# EAGLE board CT_schematic (EAGLE 7.6.0)

Size 100 x 80 mm. Coordinates in mm from the lower left corner, seen from the top.
Outline: 0,0 100,0 100,80 0,80 0,0
Copper layers (1*16): Top 0.035mm / dielectric 1.5mm / Bottom 0.035mm
Design rules "default": minimum track width 10mil, minimum drill 24mil, track to track 8mil, track to pad 8mil, pad to pad 8mil, via to via 8mil, smd to smd 8mil, copper to edge 40mil, drill to drill 8mil, minimum pad ring 10mil, minimum via ring 8mil, stop-mask expansion 4mil, vias tented up to drill 0mil, thermal gap 10mil

## Footprints (pad centres in the part's own frame; a part is rotated, then mirrored left to right if it is on the bottom)
C0603 = smd 0.8 x 0.8: 1 -0.762,0; 2 0.762,0
C0402 = smd 0.5 x 0.5: 1 -0.508,0; 2 0.508,0
C0805 = smd 1.2 x 1.3: 1 -1.016,0; 2 1.016,0
C1210 = smd 1.2 x 2.5: 1 -1.524,0; 2 1.524,0
EXV-9H = smd 3.505 x 1.676: 1 -2.857,0; 2 2.857,0
L1210 = smd 1.2 x 2.5: 1 -1.524,0; 2 1.524,0
PJ-037B_PACKAGE = drill 3.7 square: 1 12,0 | drill 3.2 square: 2 6,0
R0603 = smd 0.8 x 0.8: 1 -0.762,0; 2 0.762,0
WLCSP104 = smd 0.229 x 0.229: A1 -1.6,2.2; A2 -1.2,2.2; A3 -0.8,2.2; A4 -0.4,2.2; A5 0,2.2; A6 0.4,2.2; A7 0.8,2.2; A8 1.2,2.2; A9 1.6,2.2; B1 -1.6,1.8; B2 -1.2,1.8; B3 -0.8,1.8; B4 -0.4,1.8; B5 0,1.8; B6 0.4,1.8; B7 0.8,1.8; B8 1.2,1.8; B9 1.6,1.8; C1 -1.6,1.4; C2 -1.2,1.4; C3 -0.8,1.4; C4 -0.4,1.4; C5 0,1.4; C6 0.4,1.4; C7 0.8,1.4; C8 1.2,1.4; C9 1.6,1.4; D1 -1.6,1; D2 -1.2,1; D3 -0.8,1; D4 -0.4,1; D5 0,1; D6 0.4,1; D7 0.8,1; D8 1.2,1; D9 1.6,1; E1 -1.6,0.6; E2 -1.2,0.6; E3 -0.8,0.6; E4 -0.4,0.6; E6 0.4,0.6; E7 0.8,0.6; E8 1.2,0.6; E9 1.6,0.6; F1 -1.6,0.2; F2 -1.2,0.2; F3 -0.8,0.2; F4 -0.4,0.2; F6 0.4,0.2; F7 0.8,0.2; F8 1.2,0.2; F9 1.6,0.2; G1 -1.6,-0.2; G2 -1.2,-0.2; G3 -0.8,-0.2; G4 -0.4,-0.2; G6 0.4,-0.2; G7 0.8,-0.2; G8 1.2,-0.2; G9 1.6,-0.2; H1 -1.6,-0.6; H2 -1.2,-0.6; H3 -0.8,-0.6; H4 -0.4,-0.6; H6 0.4,-0.6; H7 0.8,-0.6; H8 1.2,-0.6; H9 1.6,-0.6; J1 -1.6,-1; J2 -1.2,-1; J3 -0.8,-1; J4 -0.4,-1; J5 0,-1; J6 0.4,-1; J7 0.8,-1; J8 1.2,-1; J9 1.6,-1; K1 -1.6,-1.4; K2 -1.2,-1.4; K3 -0.8,-1.4; K4 -0.4,-1.4; K5 0,-1.4; K6 0.4,-1.4; K7 0.8,-1.4; K8 1.2,-1.4; K9 1.6,-1.4; L1 -1.6,-1.8; L2 -1.2,-1.8; L3 -0.8,-1.8; L4 -0.4,-1.8; L5 0,-1.8; L6 0.4,-1.8; L7 0.8,-1.8; L8 1.2,-1.8; L9 1.6,-1.8; M1 -1.6,-2.2; M2 -1.2,-2.2; M3 -0.8,-2.2; M4 -0.4,-2.2; M5 0,-2.2; M6 0.4,-2.2; M7 0.8,-2.2; M8 1.2,-2.2; M9 1.6,-2.2
SSOP-16 = smd 1.981 x 0.356: 1 -2.464,2.223; 2 -2.464,1.587; 3 -2.464,0.953; 4 -2.464,0.318; 5 -2.464,-0.318; 6 -2.464,-0.953; 7 -2.464,-1.587; 8 -2.464,-2.223; 9 2.464,-2.223; 10 2.464,-1.587; 11 2.464,-0.953; 12 2.464,-0.318; 13 2.464,0.318; 14 2.464,0.953; 15 2.464,1.587; 16 2.464,2.223
HTSS-105-01-G-D = drill 1 pad 1.8 square: 1 0,0 | drill 1 pad 1.8: 2 0,2.54; 3 2.54,0; 4 2.54,2.54; 5 5.08,0; 6 5.08,2.54; 7 7.62,0; 8 7.62,2.54; 9 10.16,0; 10 10.16,2.54
M41T65_QFN-16 = smd 0.775 x 0.305: 1 -1.387,0.75; 2 -1.387,0.25; 3 -1.387,-0.25; 4 -1.387,-0.75; 9 1.387,-0.75; 10 1.387,-0.25; 11 1.387,0.25; 12 1.387,0.75 | smd 0.305 x 0.775: 5 -0.75,-1.387; 6 -0.25,-1.387; 7 0.25,-1.387; 8 0.75,-1.387; 13 0.75,1.387; 14 0.25,1.387; 15 -0.25,1.387; 16 -0.75,1.387 | smd 1.6 x 1.6: 17 0,0
QFN-32 = smd 0.6 x 0.3: 1 -2.3,1.75; 2 -2.3,1.25; 3 -2.3,0.75; 4 -2.3,0.25; 5 -2.3,-0.25; 6 -2.3,-0.75; 7 -2.3,-1.25; 8 -2.3,-1.75; 17 2.3,-1.75; 18 2.3,-1.25; 19 2.3,-0.75; 20 2.3,-0.25; 21 2.3,0.25; 22 2.3,0.75; 23 2.3,1.25; 24 2.3,1.75 | smd 0.3 x 0.6: 9 -1.75,-2.3; 10 -1.25,-2.3; 11 -0.75,-2.3; 12 -0.25,-2.3; 13 0.25,-2.3; 14 0.75,-2.3; 15 1.25,-2.3; 16 1.75,-2.3; 25 1.75,2.3; 26 1.25,2.3; 27 0.75,2.3; 28 0.25,2.3; 29 -0.25,2.3; 30 -0.75,2.3; 31 -1.25,2.3; 32 -1.75,2.3 | smd 3.2 x 3.2: EXP 0,0
SJ-43515TS-SMT-TR = smd 2.2 x 3: 1 0.6,-7.4; 4 3.4,-7.4 | smd 3 x 3: 2 12.8,-7.4; 5 17,-3 | smd 2 x 3: 3 5.3,0; 6 2.5,0 | drill 1.8: P$7 4.5,-3.69; P$8 11.54,-3.69
WM-64PC = drill 0.6 pad 1: 1 -1,0.95; 2 -1,-0.95
ABS07-32.768KHZ-7-T = smd 1.1 x 2.4: 1 -2.5,0; 2 0,0
ABLS-25.000MHZ-B2F-T = smd 5.6 x 2.8: 1 -3.81,0; 2 5.69,0
ASFL1 = smd 1.7 x 1.5: 1 -1.27,-1.1; 2 1.27,-1.1; 3 1.27,1.1; 4 -1.27,1.1
WSON-8 = smd 0.3 x 0.6: 1 -0.75,0; 2 0.05,0; 3 0.85,0; 4 1.65,0; 5 1.65,3.8; 6 0.85,3.8; 7 0.05,3.8; 8 -0.75,3.8 | smd 3 x 2.6: PAD 0.45,1.9
SON-6 = smd 0.55 x 0.3: 1 -0.355,0.5 | smd 0.52 x 0.3: 2 -0.37,0; 3 -0.37,-0.5; 4 0.37,-0.5; 5 0.37,0; 6 0.37,0.5
SW_4-1437565-2 = smd 1.4 x 2.1: 1 -2.23,4.55; 2 -2.23,-4.55; 3 2.23,4.55; 4 2.23,-4.55
LGM67K-G1J2-24-Z = smd 0.8 x 1.4: A -2,0; C 0,0
NC7SZ125M5X = smd 1.3 x 0.7: 1 -1.3,0.95; 2 -1.3,0; 3 -1.3,-0.95; 4 1.3,-0.95; 5 1.3,0.95

## Placement (x,y rotation side)
C1  1e-07  [C0603]  -77.47,67.31 0 top  (outside the outline)
C2  1e-07  [C0603]  -81.28,67.31 0 top  (outside the outline)
C3  1e-07  [C0603]  -15.24,72.39 0 top  (outside the outline)
C4  1e-07  [C0603]  -19.05,72.39 0 top  (outside the outline)
C5  1e-07  [C0603]  -22.86,72.39 0 top  (outside the outline)
C6  1e-07  [C0603]  -26.67,72.39 0 top  (outside the outline)
C7  1e-07  [C0603]  -30.48,72.39 0 top  (outside the outline)
C8  4.7e-06  [C0603]  -69.85,67.31 0 top  (outside the outline)
C9  1e-07  [C0603]  -34.29,72.39 0 top  (outside the outline)
C10  1e-08  [C0603]  -38.1,72.39 0 top  (outside the outline)
C11  1e-06  [C0603]  -41.91,72.39 0 top  (outside the outline)
C12  1e-11  [C0402]  -64.77,77.47 0 top  (outside the outline)
C13  1e-11  [C0402]  -68.58,77.47 0 top  (outside the outline)
C14  1e-11  [C0402]  -72.39,77.47 0 top  (outside the outline)
C15  1e-11  [C0402]  -76.2,77.47 0 top  (outside the outline)
C16  1e-06  [C0603]  -45.72,72.39 0 top  (outside the outline)
C17  1e-06  [C0603]  -49.53,72.39 0 top  (outside the outline)
C18  2.2e-07  [C0603]  -73.66,67.31 0 top  (outside the outline)
C19  1e-06  [C0603]  -53.34,72.39 0 top  (outside the outline)
C20  1e-06  [C0603]  -57.15,72.39 0 top  (outside the outline)
C21  4.7e-06  [C0805]  -78.74,59.69 0 top  (outside the outline)
C22  1e-06  [C0603]  -60.96,72.39 0 top  (outside the outline)
C23  1e-06  [C0603]  -64.77,72.39 0 top  (outside the outline)
C24  1e-06  [C0603]  -68.58,72.39 0 top  (outside the outline)
C25  1e-06  [C0603]  -72.39,72.39 0 top  (outside the outline)
C26  1e-06  [C0603]  -76.2,72.39 0 top  (outside the outline)
C27  1e-06  [C0603]  -80.01,72.39 0 top  (outside the outline)
C28  1e-06  [C0603]  -15.24,77.47 0 top  (outside the outline)
C29  1e-07  [C0402]  -80.01,77.47 0 top  (outside the outline)
C30  1e-07  [C0402]  -15.24,82.55 0 top  (outside the outline)
C31  1e-07  [C0402]  -19.05,82.55 0 top  (outside the outline)
C32  1e-07  [C0402]  -22.86,82.55 0 top  (outside the outline)
C33  1e-06  [C0603]  -19.05,77.47 0 top  (outside the outline)
C34  1e-08  [C0402]  -26.67,82.55 0 top  (outside the outline)
C35  1e-08  [C0402]  -30.48,82.55 0 top  (outside the outline)
C36  1e-05  [C1210]  -48.26,60.96 0 top  (outside the outline)
C37  1e-05  [C0805]  -15.24,67.31 0 top  (outside the outline)
C38  1e-08  [C0402]  -34.29,82.55 0 top  (outside the outline)
C39  1e-05  [C1210]  -54.61,60.96 0 top  (outside the outline)
C40  1e-05  [C1210]  -60.96,60.96 0 top  (outside the outline)
C41  1e-07  [C0402]  -38.1,82.55 0 top  (outside the outline)
C42  0.0001  [EXV-9H]  -17.78,53.34 0 top  (outside the outline)
C43  0.0001  [EXV-9H]  -29.21,53.34 0 top  (outside the outline)
C44  1e-08  [C0402]  -41.91,82.55 0 top  (outside the outline)
I1  1e-05  [L1210]  -67.31,60.96 0 top  (outside the outline)
J1  PJ-037B  [PJ-037B_PACKAGE]  -55.88,21.59 0 top  (outside the outline)
R2  1000.0  [R0603]  -22.86,77.47 0 top  (outside the outline)
R4  4700.0  [R0603]  -26.67,77.47 0 top  (outside the outline)
R5  2200.0  [R0603]  -30.48,77.47 0 top  (outside the outline)
R6  2200.0  [R0603]  -34.29,77.47 0 top  (outside the outline)
R7  10000.0  [R0603]  -45.72,67.31 0 top  (outside the outline)
R8  100000.0  [R0603]  -20.32,67.31 0 top  (outside the outline)
R9  10000.0  [R0603]  -50.8,67.31 0 top  (outside the outline)
R10  10000.0  [R0603]  -55.88,67.31 0 top  (outside the outline)
R11  1270.0  [R0603]  -38.1,77.47 0 top  (outside the outline)
R12  1270.0  [R0603]  -41.91,77.47 0 top  (outside the outline)
R13  100000.0  [R0603]  -25.4,67.31 0 top  (outside the outline)
R14  200.0  [R0603]  -45.72,77.47 0 top  (outside the outline)
R15  1000.0  [R0603]  -49.53,77.47 0 top  (outside the outline)
R16  100000.0  [R0603]  -30.48,67.31 0 top  (outside the outline)
R17  2231.0  [R0603]  -53.34,77.47 0 top  (outside the outline)
R18  1000.0  [R0603]  -57.15,77.47 0 top  (outside the outline)
R19  10000.0  [R0603]  -60.96,67.31 0 top  (outside the outline)
R20  10000.0  [R0603]  -66.04,67.31 0 top  (outside the outline)
R21  9100.0  [R0603]  -60.96,77.47 0 top  (outside the outline)
R22  680000.0  [R0603]  -35.56,67.31 0 top  (outside the outline)
R23  120000.0  [R0603]  -40.64,67.31 0 top  (outside the outline)
U1  STM32L162VEY6TR  [WLCSP104]  -74.93,43.18 0 top  (outside the outline)
U2  LTC2804CGN-1#PBF  [SSOP-16]  -29.21,34.29 0 top  (outside the outline)
U3  HTSS-105-01-G-D  [HTSS-105-01-G-D]  -74.93,33.02 0 top  (outside the outline)
U4  M41T65Q6F  [M41T65_QFN-16]  -46.99,82.55 0 top  (outside the outline)
U5  SGTL5000XNAA3  [QFN-32]  -54.61,34.29 0 top  (outside the outline)
U6  SJ-43515TS-SMT-TR  [SJ-43515TS-SMT-TR]  -39.37,10.16 0 top  (outside the outline)
U7  SJ-43515TS-SMT-TR  [SJ-43515TS-SMT-TR]  -67.31,10.16 0 top  (outside the outline)
U8  SJ-43515TS-SMT-TR  [SJ-43515TS-SMT-TR]  -39.37,24.13 0 top  (outside the outline)
U9  WM-64PCT  [WM-64PC]  -40.64,34.29 0 top  (outside the outline)
U10  ABS07-32.768KHZ-7-T  [ABS07-32.768KHZ-7-T]  -71.12,53.34 0 top  (outside the outline)
U11  ABS07-32.768KHZ-7-T  [ABS07-32.768KHZ-7-T]  -27.94,60.96 0 top  (outside the outline)
U12  ABLS-25.000MHZ-B2F-T  [ABLS-25.000MHZ-B2F-T]  -48.26,53.34 0 top  (outside the outline)
U13  ASFL-24.57MHZ-NCS  [ASFL1]  -68.58,44.45 0 top  (outside the outline)
U14  LP3878SDX-ADJ/NOPB  [WSON-8]  -30.48,43.18 0 top  (outside the outline)
U15  LP3878SDX-ADJ/NOPB  [WSON-8]  -50.8,43.18 0 top  (outside the outline)
U16  TPS3895ADRYR  [SON-6]  -52.07,81.28 0 top  (outside the outline)
U17  4-1437565-2  [SW_4-1437565-2]  -72.39,21.59 0 top  (outside the outline)
U18  Q65110A2395  [LGM67K-G1J2-24-Z]  -36.83,60.96 0 top  (outside the outline)
U19  nc7sz125m5x  [NC7SZ125M5X]  -72.39,59.69 0 top  (outside the outline)

## Library data of the parts
C1-C44 I1 J1 R2 R4-R23 U1-U19 = circuit_tree

## Nets
CLK_CRYSTAL_U1_D8: C12.1 U1.D8 U11.1
CLK_CRYSTAL_U1_D9: C13.1 U1.D9 U11.2
CLK_CRYSTAL_U1_F8: C14.1 U1.F8 U12.1
CLK_CRYSTAL_U1_F9: C15.1 U1.F9 U12.2
CLK_CRYSTAL_U4_1: U4.1 U10.1
CLK_CRYSTAL_U4_2: U4.2 U10.2
CLK_U5_21: U5.21 U13.3
GND: C1.2 C2.2 C3.2 C4.2 C5.2 C6.2 C7.2 C8.2 C9.2 C10.2 C11.2 C12.2 C13.2 C14.2 C15.2 C16.2 C17.2 C19.2 C20.2 C21.2 C29.2 C30.2 C31.2 C32.2 C33.2 C34.2 C35.2 C36.2 C37.2 C38.2 C39.2 C40.2 C41.2 C42.2 C43.2 C44.2 J1.2 R2.2 R7.2 R12.2 R15.2 R18.2 R21.2 R23.2 U1.A1 U1.C7 U1.D2 U1.E8 U1.H8 U1.J9 U1.K8 U1.L2 U1.M1 U2.8 U3.9 U4.3 U4.5 U4.17 U5.1 U5.3 U5.7 U5.EXP U7.1 U8.1 U9.2 U13.2 U14.3 U14.PAD U15.3 U15.PAD U16.2 U18.C U19.1 U19.3
NET_U1_A7: R7.1 U1.A7
NET_U1_B6: R6.1 U1.B6 U4.9
NET_U1_C5: R5.1 U1.C5 U4.10
NET_U1_E7: C9.1 U1.E7
NET_U1_F7: R4.1 U1.F7 U19.4
NET_U1_M7: U18.A
NET_U1_M8: U17.3 U17.4
NET_U2_6: C16.1 U2.6
NET_U2_7: C18.1 I1.2 U2.7
NET_U2_9: C17.1 U2.9
NET_U2_10: C18.2 U2.10
NET_U2_11: R8.1 U2.11
NET_U3_3: U2.1 U3.3
NET_U3_4: U2.2 U3.4
NET_U3_5: U2.3 U3.5
NET_U3_6: U2.4 U3.6
NET_U4_4: R9.1 U4.4
NET_U4_11: R10.1 U4.11
NET_U5_10: C32.1 U5.10
NET_U5_29: R11.1 U5.29
NET_U5_31: R12.1 U5.31
NET_U6_1: U5.4 U6.1
NET_U6_2: U5.2 U6.2
NET_U6_5: U5.6 U6.5
NET_U7_2: C23.1 U7.2
NET_U7_5: C22.1 U7.5
NET_U7_11: C23.2
NET_U7_12: C22.2
NET_U8_2: C25.1 C26.1 U8.2
NET_U8_5: C24.1 U8.5
NET_U8_13: C25.2 C26.2
NET_U8_14: C24.2
NET_U9_1: C27.1 C28.1 C33.1 U5.16 U9.1
NET_U9_15: C27.2 C28.2
NET_U14_1: C35.1 U14.1
NET_U14_6: R14.2 R15.1 U14.6
NET_U14_8: R13.1 U14.8
NET_U15_1: C38.1 U15.1
NET_U15_6: R17.2 R18.1 U15.6
NET_U15_8: R16.1 U15.8
NET_U16_1: R20.1 R21.1 U16.1
NET_U16_3: R22.2 R23.1 U16.3
NET_U16_4: R19.1 U16.4 U19.2
NET_U17_1: R2.1 U17.1 U17.2
PROC_I2S2_CK: U1.D4 U5.24
PROC_I2S2_SD: U1.A3 U5.26
PROC_I2S2_WS: U1.A2 U5.23
PROC_UART4_RX: U1.C2 U2.16
PROC_UART4_TX: U1.E4 U2.14
VCC_S1_11V6: C36.1 C39.1 C42.1 C43.1 J1.1 R13.2 R16.2 U14.4 U15.4
VCC_TIER1_1V2: C29.1 C37.1 R14.1 U5.30 U14.5
VCC_TIER1_3V3: C1.1 C2.1 C3.1 C4.1 C5.1 C6.1 C7.1 C8.1 C10.1 C11.1 C19.1 C20.1 C21.1 C30.1 C31.1 C34.1 C40.1 C41.1 C44.1 I1.1 R4.2 R5.2 R6.2 R8.2 R9.2 R10.2 R11.2 R17.1 R19.2 R20.2 R22.1 U1.A9 U1.B8 U1.C1 U1.E9 U1.G6 U1.G7 U1.K3 U1.L8 U1.M9 U2.5 U2.12 U4.14 U5.5 U5.20 U13.4 U15.5 U16.6 U19.5

## Tracks (layer width: path | path; a pad name or v marks a point on that pad's centre or on a via)
CLK_CRYSTAL_U1_D8  (2 unrouted)
CLK_CRYSTAL_U1_D9  (2 unrouted)
CLK_CRYSTAL_U1_F8  (2 unrouted)
CLK_CRYSTAL_U1_F9  (2 unrouted)
CLK_CRYSTAL_U4_1  (1 unrouted)
CLK_CRYSTAL_U4_2  (1 unrouted)
CLK_U5_21  (1 unrouted)
GND  (73 unrouted)
NET_U1_A7  (1 unrouted)
NET_U1_B6  (2 unrouted)
NET_U1_C5  (2 unrouted)
NET_U1_E7  (1 unrouted)
NET_U1_F7  (2 unrouted)
NET_U1_M8  (1 unrouted)
NET_U2_6  (1 unrouted)
NET_U2_7  (2 unrouted)
NET_U2_9  (1 unrouted)
NET_U2_10  (1 unrouted)
NET_U2_11  (1 unrouted)
NET_U3_3  (1 unrouted)
NET_U3_4  (1 unrouted)
NET_U3_5  (1 unrouted)
NET_U3_6  (1 unrouted)
NET_U4_4  (1 unrouted)
NET_U4_11  (1 unrouted)
NET_U5_10  (1 unrouted)
NET_U5_29  (1 unrouted)
NET_U5_31  (1 unrouted)
NET_U6_1  (1 unrouted)
NET_U6_2  (1 unrouted)
NET_U6_5  (1 unrouted)
NET_U7_2  (1 unrouted)
NET_U7_5  (1 unrouted)
NET_U8_2  (2 unrouted)
NET_U8_5  (1 unrouted)
NET_U8_13  (1 unrouted)
NET_U9_1  (4 unrouted)
NET_U9_15  (1 unrouted)
NET_U14_1  (1 unrouted)
NET_U14_6  (2 unrouted)
NET_U14_8  (1 unrouted)
NET_U15_1  (1 unrouted)
NET_U15_6  (2 unrouted)
NET_U15_8  (1 unrouted)
NET_U16_1  (2 unrouted)
NET_U16_3  (2 unrouted)
NET_U16_4  (2 unrouted)
NET_U17_1  (2 unrouted)
PROC_I2S2_CK  (1 unrouted)
PROC_I2S2_SD  (1 unrouted)
PROC_I2S2_WS  (1 unrouted)
PROC_UART4_RX  (1 unrouted)
PROC_UART4_TX  (1 unrouted)
VCC_S1_11V6  (8 unrouted)
VCC_TIER1_1V2  (4 unrouted)
VCC_TIER1_3V3  (48 unrouted)